# Altium PCB Edubot v1.2.PcbDoc
Units mm, origin at the board's own origin, x right, y up, seen from the top; angles counter-clockwise.
Board outline 65 x 56 mm, 4 copper layers (Top Signal Layer, Power Layer, Ground Layer, Bottom Signal Layer), stack 2.024 mm thick; 57 components, 41 nets, 232 pads, 151 vias.
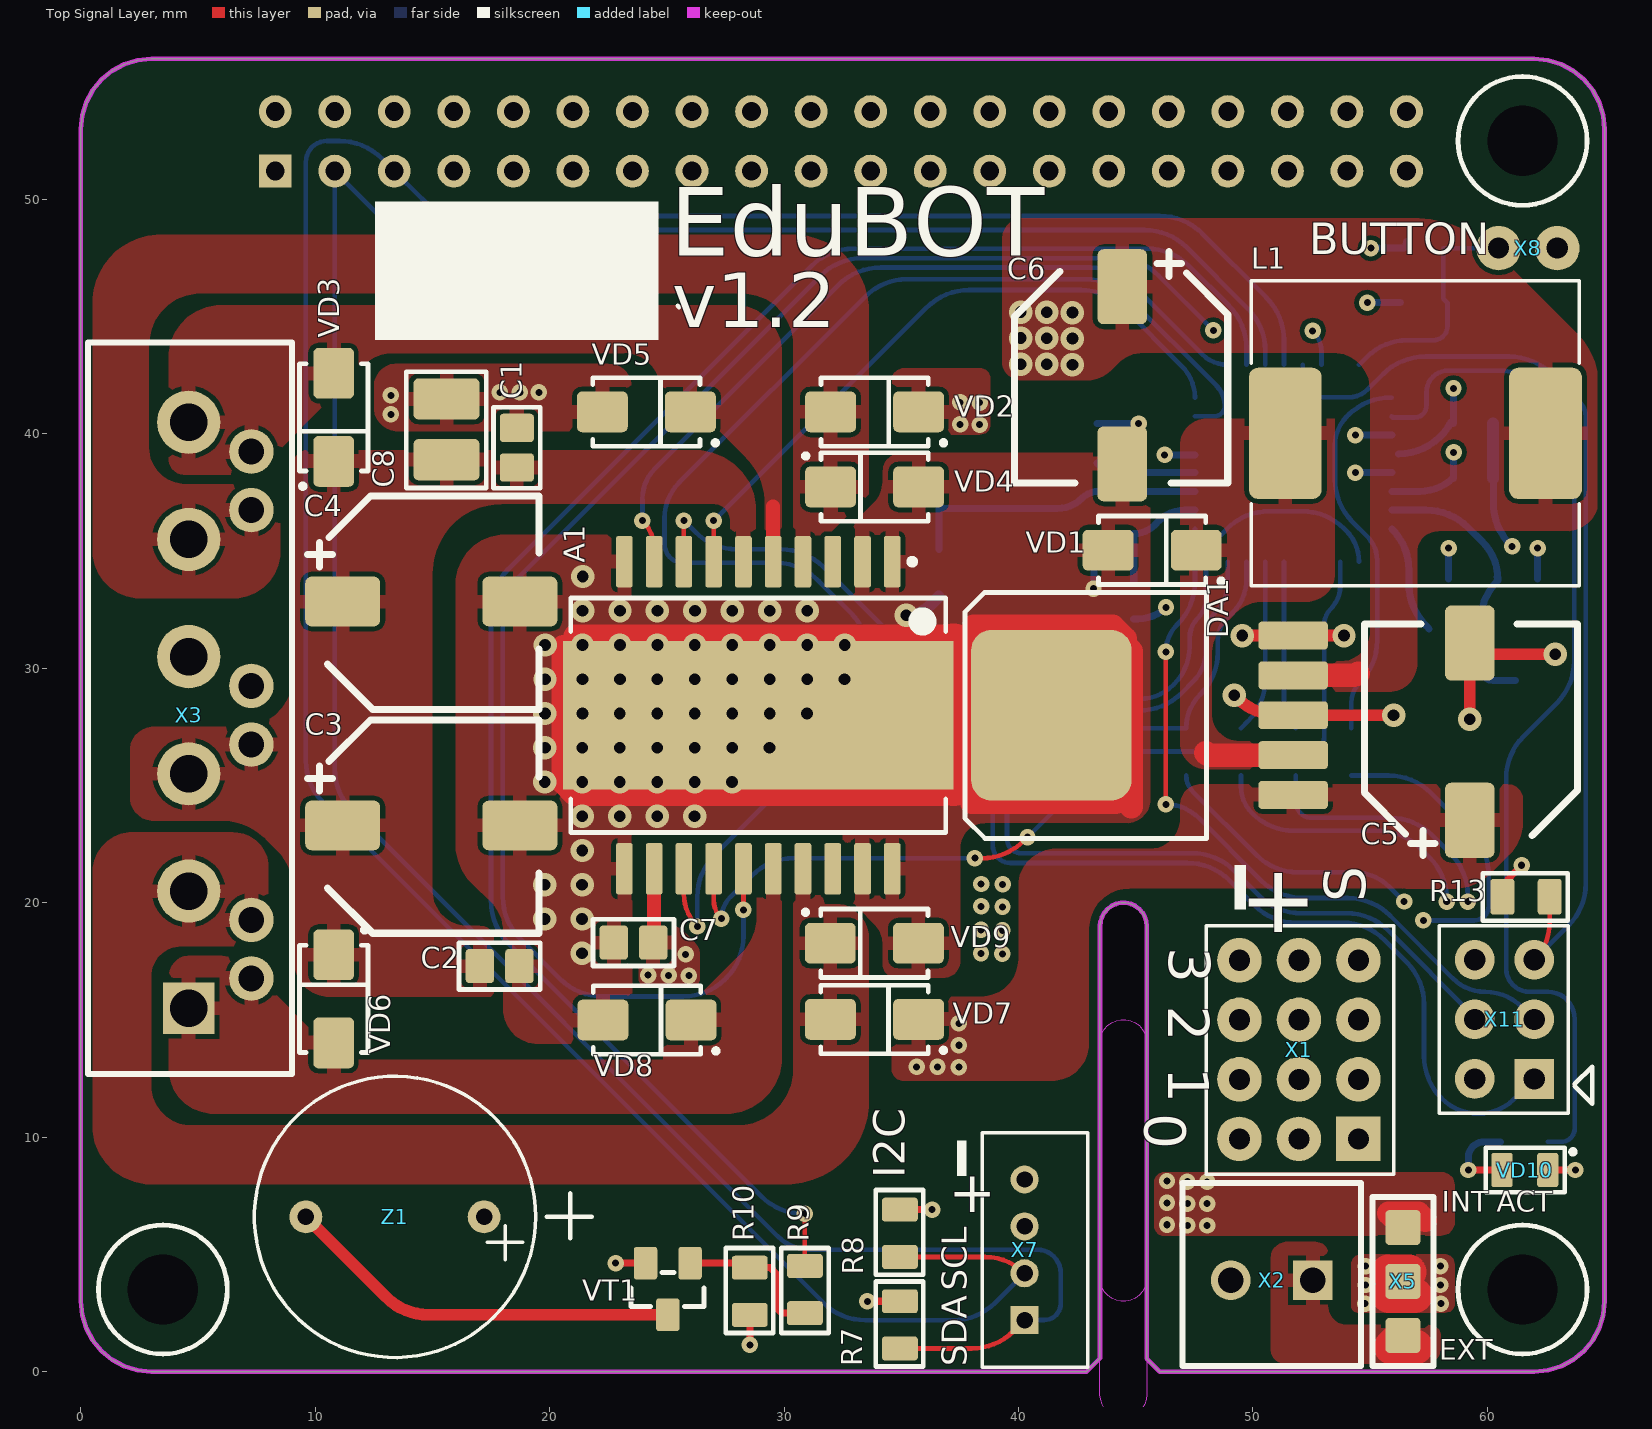
[diagram p0: Top Signal Layer view]
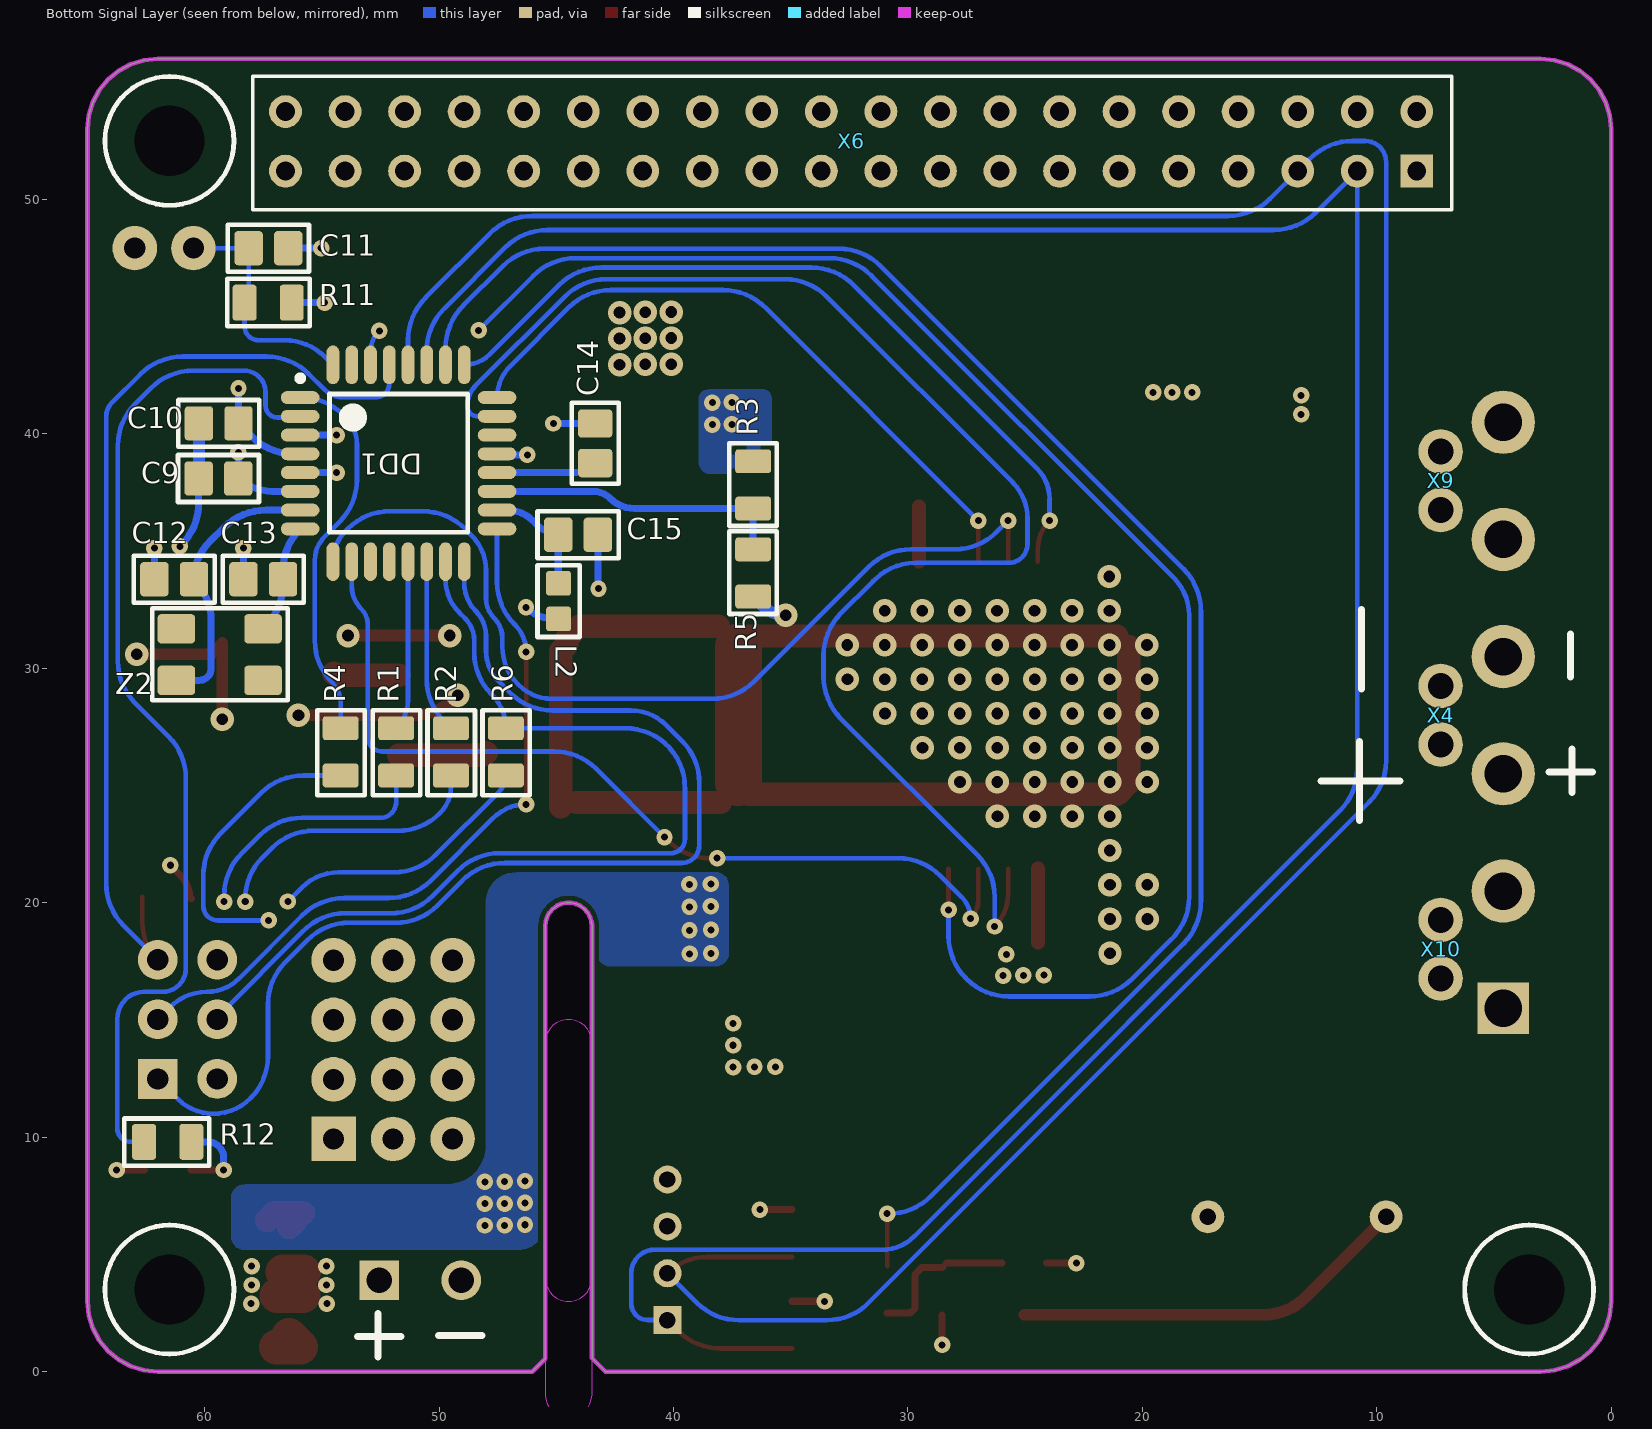
[diagram p1: Bottom Signal Layer view, seen from below]
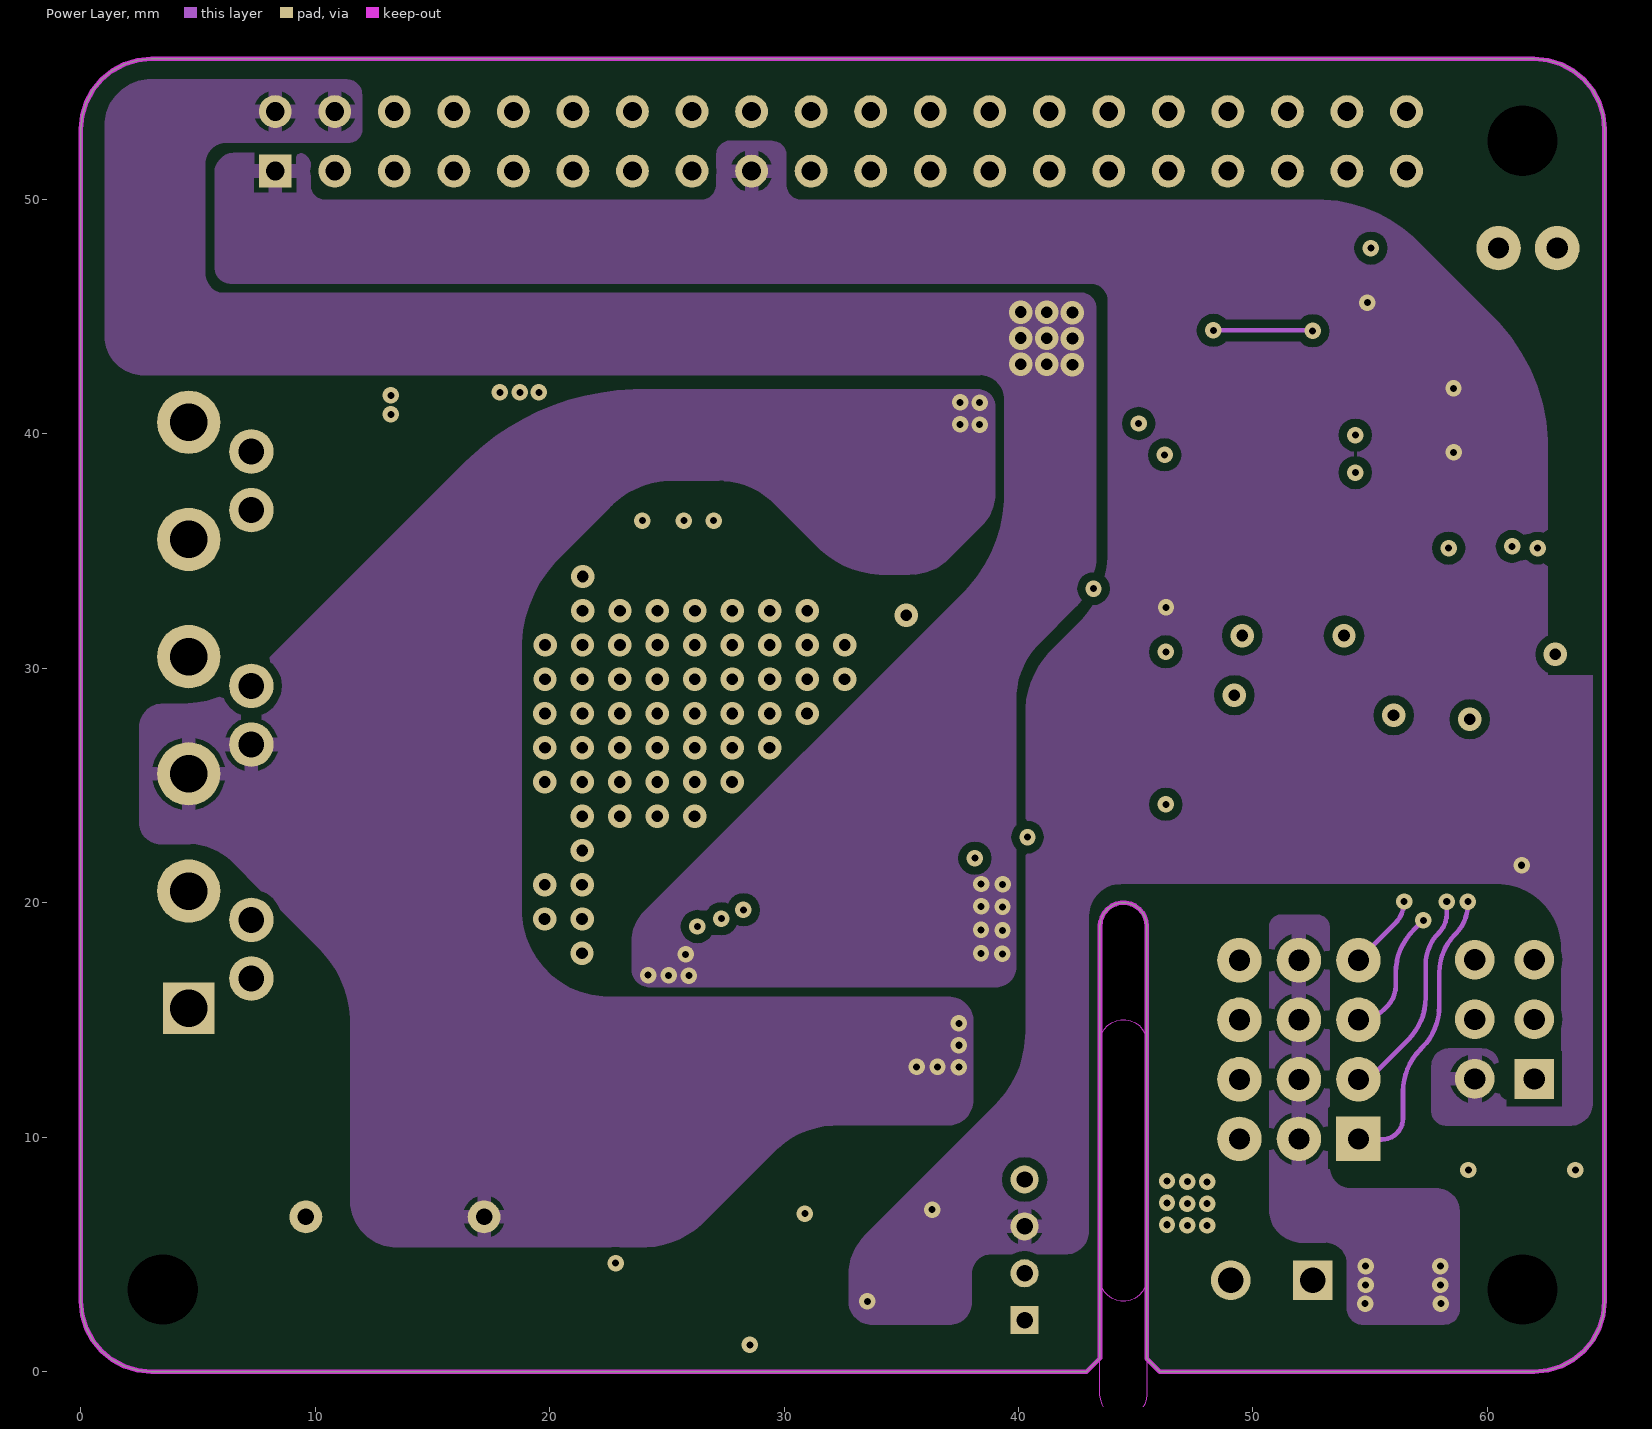
[diagram p2: Power Layer]
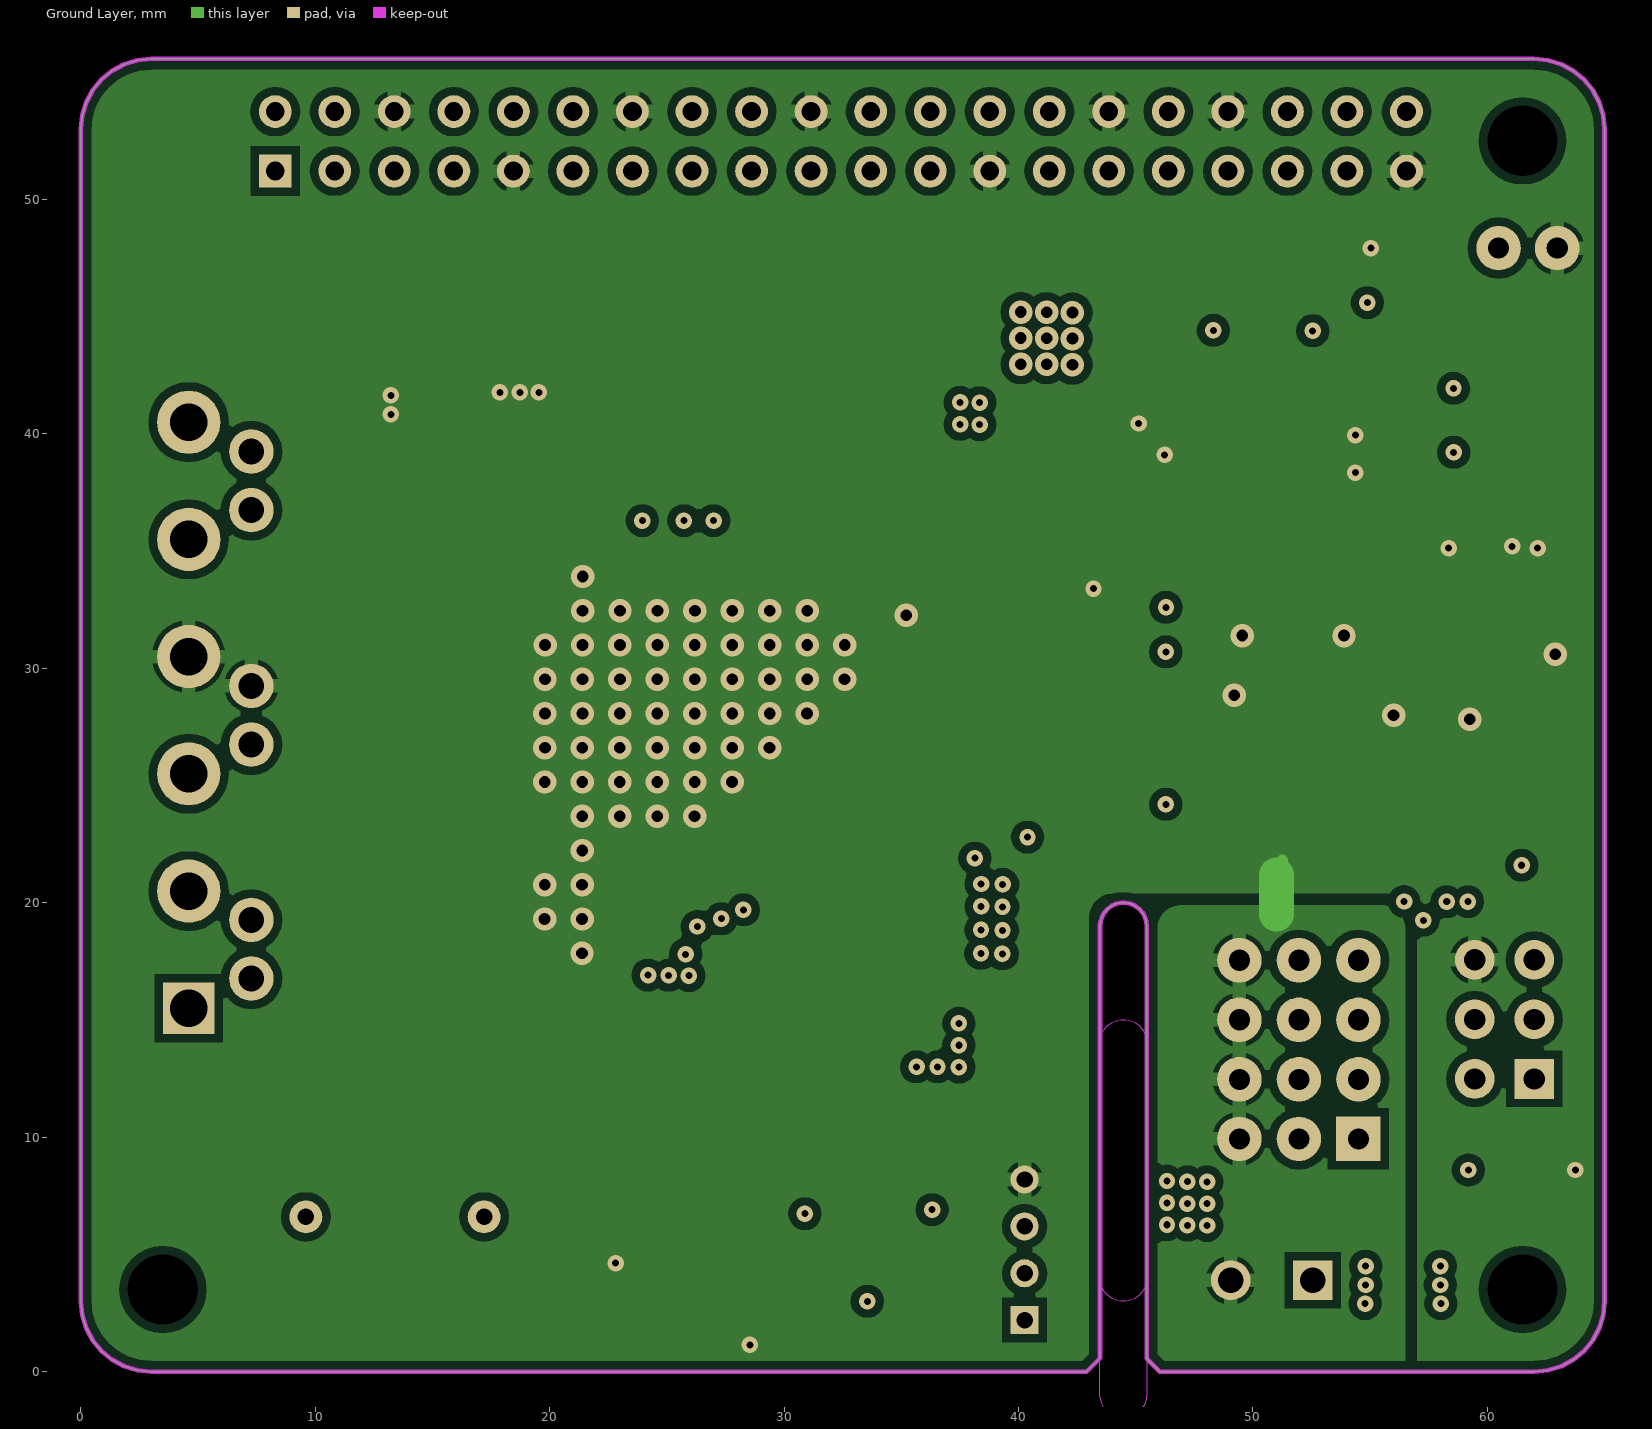
[diagram p3: Ground Layer]

## Layer stack, top to bottom
Top Solder: solder mask 0.0102, Solder Resist, Dk 3.5
Top Signal Layer: signal copper 0.0356
Dielectric 1: core 1.5, FR-4, Dk 4.2
Power Layer: signal copper 0.036
Dielectric 3: prepreg 0.127, Dk 4.2
Ground Layer: signal copper 0.036
Dielectric 2: core 0.254, Dk 4.2
Bottom Signal Layer: signal copper 0.0356
Bottom Solder: solder mask 0.0102, Solder Resist, Dk 3.5

## Board outline
0.879,0.879 0.506,1.333 0.228,1.852 0.058,2.415 0,3 0,53 0.058,53.585 0.228,54.148 0.506,54.667 0.879,55.121 1.333,55.494 1.852,55.772 2.415,55.942 3,56 62,56 62.585,55.942 63.148,55.772 63.667,55.494 64.121,55.121 64.494,54.667 64.772,54.148 64.942,53.585 65,53 65,3 64.942,2.415 64.772,1.852 64.494,1.333 64.121,0.879 63.667,0.506 63.148,0.228 62.585,0.058 62,0 46.025,0 45.475,0.55 45.475,19 45.453,19.208 45.389,19.407 45.284,19.588 45.144,19.743 44.975,19.866 44.784,19.951 44.58,19.995 44.37,19.995 44.166,19.951 43.975,19.866 43.806,19.743 43.666,19.588 43.561,19.407 43.497,19.208 43.475,19 43.475,0.575 42.9,0 3,0 2.415,0.058 1.852,0.228 1.333,0.506
cut-out: 45.475,4 45.453,3.792 45.389,3.593 45.284,3.412 45.144,3.257 44.975,3.134 44.784,3.049 44.58,3.006 44.37,3.006 44.166,3.049 43.975,3.134 43.806,3.257 43.666,3.412 43.561,3.593 43.497,3.792 43.475,4 43.475,19 43.497,19.208 43.561,19.407 43.666,19.588 43.806,19.743 43.975,19.866 44.166,19.951 44.37,19.995 44.58,19.995 44.784,19.951 44.975,19.866 45.144,19.743 45.284,19.588 45.389,19.407 45.453,19.208 45.475,19
cut-out: 45.475,-0.977 45.453,-1.185 45.389,-1.384 45.284,-1.565 45.144,-1.721 44.975,-1.843 44.784,-1.928 44.58,-1.972 44.37,-1.972 44.166,-1.928 43.975,-1.843 43.806,-1.721 43.666,-1.565 43.561,-1.384 43.497,-1.185 43.475,-0.977 43.475,14.023 43.497,14.231 43.561,14.429 43.666,14.61 43.806,14.766 43.975,14.889 44.166,14.974 44.37,15.017 44.58,15.017 44.784,14.974 44.975,14.889 45.144,14.766 45.284,14.61 45.389,14.429 45.453,14.231 45.475,14.023

## Design rules (kind name [scope] priority, off if disabled: settings)
Clearance Clearance_tracks_inner [OnLayer('Power Layer') OR OnLayer('Ground Layer')] p1: gap=0.35 // Зазоры между проводниками на внутренних слоях
Clearance Clearance_VccGND [InNet('12В') vs InNet('GND')] p2: gap=0.2 except(0.4: THPad-Poly)
Clearance Clearance_VccGND_5B [InNet('5В') vs InNet('GND')] p3: gap=0.2 except(0.4: THPad-Poly)
Clearance Clearance_VccGND_12B_1 [InNet('NetFU1_1') vs InNet('GND')] p4: gap=0.2 except(0.4: THPad-Poly)
Clearance [All] p5: gap=0.2
ComponentClearance [All] p1: gap=0.001 collisioncheckmode=3 verticalgap=0 showdistances=FALSE
Height [All] p1: minheight=0 maxheight=100 prefheight=12.7
HoleSize [All] p1: absolutevalues=TRUE maxlimit=10 minlimit=0.3 maxpercent=80.000 minpercent=20.000
MinimumSolderMaskSliver [All] p1: minsoldermaskwidth=0.1
PolygonConnect PolygonConnect_Via [IsVia] p1: connectstyle=Direct reliefconductorwidth=0.254 reliefentries=4 polygonreliefangle="90 Angle" airgapwidth=0.2
PolygonConnect [All] p2: connectstyle=Relief reliefconductorwidth=0.6 reliefentries=4 polygonreliefangle="90 Angle" airgapwidth=0.2
RoutingVias [All] p1: holewidth=0.711 width=1.27 viastyle="Through Hole" minholewidth=0.711 minwidth=1.27 maxholewidth=0.711 maxwidth=1.27
ShortCircuit ShortCircuitAGND [InNet('GND') vs InNet('AGND')] p1: allowed=TRUE
ShortCircuit ShortCircuitAnalog [InNet('12В') vs InNet('12ВA')] p2: allowed=TRUE
ShortCircuit ShortCircuitAll [All] p3: allowed=FALSE
SilkToSilkClearance [All] p1: silktosilkclearance=0
SilkToSolderMaskClearance [IsPad] p1: minsilkscreentomaskgap=0 clearancetoexposedcopper=TRUE
SolderMaskExpansion [All] p1: expansion=0.05
Width [All] p1: maxlimit=4 minlimit=0.2 preferedwidth=0.2
Width 3,3В [InNet('3,3В')] p2: maxlimit=2 minlimit=0.2 preferedwidth=1
Width 24В [InNet('24В')] p3: maxlimit=4 minlimit=0.2 preferedwidth=4
Width 5В [InNet('5В')] p4: maxlimit=3 minlimit=0.2 preferedwidth=3
23 further rules are at their usual default settings.

## Components (designator, comment, footprint, x,y, rotation, side; value= is the part's Value field where it differs from the comment)
A1 "L298P" POWERSO20 28.9,28 r270 top
C1 "2,2мк" C0805 18.6,39.411 r270 top
C2 "2,2мк" C0805 17.864,17.3 r180 top
C3 "Capacitor_pol" Cap_SMD_radial_polar(8x10.2) 14.95,23.3 r90 top
C4 "Capacitor_pol" Cap_SMD_radial_polar(8x10.2) 14.95,32.85 r90 top
C5 "Capacitor_pol" Cap_SMD_radial_polar(8x10.2) 59.25,27.3 r180 top
C6 "Capacitor_pol" Cap_SMD_radial_polar(8x10.2) 44.425,42.5 r0 top
C7 "0,1мк" C0805 23.575,18.3 r0 top
C8 "10мк" C1210 15.6,40.196 r270 top
C9 "0,1мк" C0805 59.41,38.1 r180 bottom
C10 "0,1мк" C0805 59.4,40.45 r180 bottom
C11 "0,1мк" C0805 57.278,47.925 r0 bottom
C12 "22" C0805 61.3,33.803 r180 bottom
C13 "22" C0805 57.5,33.803 r180 bottom
C14 "0,1мк" C0805 43.34,39.6 r270 bottom
C15 "0,1мк" C0805 44.07,35.7 r0 bottom
DA1 "LM2596S" TO-263-5 51.715,28 r90 top
DD1 "ATmega328P-AU" TQFP-32 51.725,38.75 r180 bottom
L1 "Inductor" IND_12.5x12.5 56.93,40.025 r0 top
L2 "Inductor" L0603 44.9,32.869 r270 bottom
R1 "Resistor_0,125Вт" R0805 51.83,26.437 r270 bottom
R2 "Resistor_0,125Вт" R0805 49.49,26.437 r270 bottom
R3 "Resistor_0,125Вт" R0805 36.6,37.826 r90 bottom
R4 "Resistor_0,125Вт" R0805 54.2,26.437 r270 bottom
R5 "Resistor_0,125Вт" R0805 36.6,34.07 r90 bottom
R6 "Resistor_0,125Вт" R0805 47.15,26.437 r270 bottom
R7 "Resistor_0,125Вт" R0805 34.939,1.994 r90 top
R8 "Resistor_0,125Вт" R0805 34.939,5.9 r90 top
R9 "Resistor_0,125Вт" R0805 30.884,3.5 r270 top
R10 "Resistor_0,125Вт" R0805 28.535,3.425 r90 top
R11 "Resistor_0,125Вт" R0805 57.291,45.6 r180 bottom
R12 "Resistor_0,125Вт" R0805 61.575,9.8 r0 bottom
R13 "Resistor_0,125Вт" R0805 61.65,20.257 r180 top
VD1 "DiodeSchottky" SMA 45.7,35.039 r180 top
VD2 "DiodeSchottky" SMA 33.86,40.94 r180 top
VD3 "DiodeSchottky" SMA 10.785,40.71 r90 top
VD4 "DiodeSchottky" SMA 33.86,37.74 r0 top
VD5 "DiodeSchottky" SMA 24.125,40.94 r180 top
VD6 "DiodeSchottky" SMA 10.785,15.9 r270 top
VD7 "DiodeSchottky" SMA 33.855,15.025 r180 top
VD8 "DiodeSchottky" SMA 24.15,15 r180 top
VD9 "DiodeSchottky" SMA 33.85,18.275 r0 top
VD10 "LED" L_0805 61.6,8.6 r180 top
VT1 "N-MOSFET" SOT23-3 25.04,3.425 r180 top
X1 "Servo" PLS-12 54.5,9.928 r180 top
X2 "Header_2_trm" TERMINAL-2WAY-3.5MM 50.8,3.896 r180 top
X3 "" TERMINAL-6WAY-5MM 4.6,28 r90 top locked
X4 "Header_2_sct" 2HOLE_2.5#1 7.822,28 r0 bottom
X5 "Header_3_sct" TAB_3PAD 56.4,3.846 r270 top
X6 "Подключение Raspberry" PBS-40 8.291,51.213 r270 bottom locked
X7 "Дисплей" MW-4M 40.257,5.194 r180 top
X8 "Header_2_sct" 2HOLE_2.5#2 61.73,48.475 r90 top
X9 "Header_2_sct" 2HOLE_2.5#1 7.822,38 r0 bottom
X10 "Header_2_sct" 2HOLE_2.5#1 7.822,18.02 r0 bottom
X11 "Программатор ISP mkII" PLS2-6 60.725,15.128 r180 top
Z1 "Name" Buzzer_gen_12mm 13.4,6.6 r180 top
Z2 "Crystal" QSMD5.0x3.2x1.0 59.359,30.588 r0 bottom

## Footprints (in the part's own frame and the unit in brackets; to place one, negate y for a bottom-side part, rotate by r counter-clockwise, add the part's x,y. Pads: shape width x height; smd on the part's side, far side on the other; paste and mask are expansions set on the pad)
2HOLE_2.5#1 [mm]
  round 1.9 hole 1.1: 1(-0.55,1.25) 2(-0.55,-1.25)
2HOLE_2.5#2 [mm]
  round 1.9 hole 0.9: 1(-0.55,1.25) 2(-0.55,-1.25)
Buzzer_gen_12mm [mm] "Излучатель звука"
  round 1.4 hole 0.7: 1(-3.8,0) 2(3.8,0)
  silkscreen extent -6,-6 6,6, body extent -9.5,-6.1 5.95,5.9, height 10.95
C0805 [mm]
  rrect25% 1.21x1.46 smd paste-5: 1(-0.845,0) 2(0.845,0)
  silkscreen extent -1.73,-1 1.73,1, body extent -1,-0.62 1,0.63, height 0.78
C1210 [mm]
  rrect25% 1.76x2.82 smd paste-5: 1(-1.295,0) 2(1.295,0)
  silkscreen extent -2.46,-1.72 2.51,1.7, body extent -1.62,-1.27 1.58,1.23, height 1.65
Cap_SMD_radial_polar(8x10.2) [mm]
  rrect25% 2.12x3.2 smd: 1(0,3.78) 2(0,-3.78)
  silkscreen extent -4.6,-4.6 4.5,5.27, body extent -4.17,-4.95 4.13,4.75, height 8.5
IND_12.5x12.5 [mm]
  rrect25% 3.1x5.6 smd: 1(-5.55,0) 2(5.55,0)
  silkscreen extent -7,-6.5 7,6.5, body extent -6.25,-6.25 6.25,6.25, height 8
L0603 [mm]
  rrect25% 1.05x1.07 smd paste-5: 1(-0.76,0) 2(0.76,0)
  silkscreen extent -1.53,-0.9 1.53,0.9, body extent -0.8,-0.4 0.8,0.4, height 0.8
L_0805 [mm] "SMD LED LAMP"
  rrect25% 0.91x1.46 smd: 1(-0.975,0) 2(0.975,0)
  silkscreen extent -2.15,-0.95 1.68,0.95, body extent -1.01,-0.62 1.01,0.63, height 1.1
MW-4M [mm]
  rect 1.2x1.2 hole 0.7: 1(0,3)
  round 1.2 hole 0.7: 2(0,1) 3(0,-1) 4(0,-3)
  silkscreen extent -2.7,-5 1.8,5, body extent -2.7,-4.95 1.8,4.95, height 6
PBS-40 [mm]
  rect 1.4x1.4 hole 0.8: 1(0,0)
  round 1.4 hole 0.8: 2(-2.54,0) 3(0,-2.54) 4(-2.54,-2.54) 5(0,-5.08) 6(-2.54,-5.08) 8(-2.54,-7.62) 9(0,-10.16) 10(-2.54,-10.16) 11(0,-12.7) 12(-2.54,-12.7) 13(0,-15.24) 14(-2.54,-15.24) 15(0,-17.78) 16(-2.54,-17.78) 19(0,-22.86) 20(-2.54,-22.86) 21(0,-25.4) 22(-2.54,-25.4) 23(0,-27.94) 24(-2.54,-27.94) 25(0,-30.48) 26(-2.54,-30.48) 27(0,-33.02) 28(-2.54,-33.02) 31(0,-38.1) 32(-2.54,-38.1) 33(0,-40.64) 34(-2.54,-40.64) 35(0,-43.18) 36(-2.54,-43.18) 39(0,-48.26) 40(-2.54,-48.26)
  round 1.4 hole 0.8 mask+0.102: 7(0,-7.62) 17(0,-20.32) 18(-2.54,-20.32) 29(0,-35.56) 30(-2.54,-35.56) 37(0,-45.72) 38(-2.54,-45.72)
  silkscreen extent -4.04,-49.66 1.66,1.5, body extent -3.81,-49.53 1.27,1.27, height 8.4
PLS2-6 [mm] "Разъем для программатора ISP"
  rect 1.7x1.7 hole 0.9: 1(-1.275,2.64)
  round 1.7 hole 0.9: 2(1.265,2.64) 3(-1.275,0.1) 4(1.265,0.1) 5(-1.275,-2.44) 6(1.265,-2.44)
  silkscreen extent -2.72,-3.9 2.77,4.1, body extent -2.52,-3.72 2.56,3.9, height 8.54
PLS-12 [mm]
  rect 1.9x1.9 hole 0.9: 1(0,0)
  round 1.9 hole 0.9: 2(2.54,0) 3(5.08,0) 4(0,-2.54) 5(2.54,-2.54) 6(5.08,-2.54) 7(0,-5.08) 8(2.54,-5.08) 9(5.08,-5.08) 11(2.54,-7.62) 12(5.08,-7.62)
  round 1.9 hole 0.9 mask+0.102: 10(0,-7.62)
  silkscreen extent -1.5,-9.1 6.5,1.5, body extent -1.31,-8.87 6.31,1.29, height 8.54
POWERSO20 [mm] "SOP, 20-Leads, Body 15.9x11mm, Pitch 1.27mm, IPC Medium Density"
  rrect25% 2.19x0.71 smd: 1(-6.55,5.715) 2(-6.55,4.445) 3(-6.55,3.175) 4(-6.55,1.905) 5(-6.55,0.635) 6(-6.55,-0.635) 7(-6.55,-1.905) 8(-6.55,-3.175) 9(-6.55,-4.445) 10(-6.55,-5.715) 11(6.55,-5.715) 12(6.55,-4.445) 13(6.55,-3.175) 14(6.55,-1.905) 15(6.55,-0.635) 16(6.55,0.635) 17(6.55,1.905) 18(6.55,3.175) 19(6.55,4.445) 20(6.55,5.715)
  rect 6.35x16.65 smd: 20(0,0)
  silkscreen extent -6.67,-8 5,8, body extent -7.15,-8 7.25,8, height 3.6
QSMD5.0x3.2x1.0 [mm] "Кварцевый резонатор KX-9A 8MHz"
  rrect25% 1.6x1.25 smd: 1(-1.85,-1.1) 2(1.85,1.1) ""(-1.85,1.1) ""(1.85,-1.1)
  silkscreen extent -2.9,-1.98 2.87,1.95, body extent -2.5,-1.6 2.5,1.6, height 1.01
R0805 [mm] "Chip Resistor, 2-Leads, Body 2,10x1,30mm, IPC Medium Density"
  rrect25% 1.02x1.53 smd paste-5: 1(-1.008,0) 2(1.007,0)
  silkscreen extent -1.78,-1 1.85,1.03, body extent -1.1,-0.7 1.1,0.7, height 0.55
SMA [mm]
  rrect25% 2.17x1.74 smd: 1(-1.88,0) 2(1.88,0)
  silkscreen extent -3.04,-1.46 2.29,1.46, body extent -2.5,-1.35 2.5,1.35, height 2.15
SOT23-3 [mm]
  rrect25% 1x1.4 smd: 1(-0.95,-1.2) 2(0.95,-1.2) 3(0,1)
  silkscreen extent -1.54,-0.8 1.57,0.65, body extent -1.5,-1.25 1.5,1.05, height 1.1
TAB_3PAD [mm]
  rrect25% 1.5x1.5 smd: 1(-2.3,0) 2(0,0) 3(2.3,0)
  silkscreen extent -3.6,-1.3 3.6,1.3
TERMINAL-2WAY-3.5MM [mm]
  rect 1.7x1.7 hole 1.1: 1(-1.75,0)
  round 1.7 hole 1.1: 2(1.75,0)
  silkscreen extent -3.8,-4.15 3.8,3.65, body extent -3.56,-3.89 3.56,3.4, height 8.51
TERMINAL-6WAY-5MM [mm]
  rect 2.2x2.2 hole 1.6: 1(-12.5,0)
  round 2.7 hole 1.6: 2(-7.5,0) 3(-2.5,0) 4(2.5,0) 5(7.5,0) 6(12.5,0)
  silkscreen extent -15.3,-4.4 15.9,4.3, body extent -14.98,-4.1 15.58,4.05, height 10
TO-263-5 [mm]
  rrect25% 1.19x2.96 smd: 1(-3.4,0) 2(-1.7,0) 3(0,0) 4(1.7,0) 5(3.4,0)
  rrect25% 7.28x6.84 smd: 6(0,10.315)
  silkscreen extent -5.26,3.7 5.23,14, body extent -5.08,-0.9 5.1,13.45, height 4.58
TQFP-32 [mm] "Thin QFP, 32-Leads, Body 7x7mm, Pitch 0.8mm, IPC Medium Density"
  oval 1.65x0.55 smd: 1(-4.2,2.8) 2(-4.2,2) 3(-4.2,1.2) 4(-4.2,0.4) 5(-4.2,-0.4) 6(-4.2,-1.2) 7(-4.2,-2) 8(-4.2,-2.8) 17(4.2,-2.8) 18(4.2,-2) 19(4.2,-1.2) 20(4.2,-0.4) 21(4.2,0.4) 22(4.2,1.2) 23(4.2,2) 24(4.2,2.8)
  oval 0.55x1.65 smd: 9(-2.8,-4.2) 10(-2,-4.2) 11(-1.2,-4.2) 12(-0.4,-4.2) 13(0.4,-4.2) 14(1.2,-4.2) 15(2,-4.2) 16(2.8,-4.2) 25(2.8,4.2) 26(2,4.2) 27(1.2,4.2) 28(0.4,4.2) 29(-0.4,4.2) 30(-1.2,4.2) 31(-2,4.2) 32(-2.8,4.2)
  silkscreen extent -4.32,-2.95 2.95,3.75, body extent -4.6,-4.6 4.6,4.6, height 1.2

## Part data
A1: library part driver1, "FULL BRIDGE DC MOTOR DRIVER"
C1 C2: library part cap152, "Конденсатор"
C3 C4 C5 C6: library part cap320, "Конденсатор полярный"
C7 C9 C10 C11 C14 C15: library part cap160, "Конденсатор"
C8: library part cap193, "Конденсатор"
C12 C13: library part cap321, "Конденсатор"
DA1: library part pwr3, "3-A Step-Down Voltage Regulator"
DD1: library part microcont1, "Микроконтроллер 8-Бит, picoPower, AVR, 20МГц, 32КБ Flash"
L1: library part ind80, "EMI Suppression Filter"
L2: library part ind0, "EMI Suppression Filter"
R1 R2 R4 R6 R9 R12: library part res41, "Резистор"
R3: library part res84, "Резистор"
R5: library part res57, "Резистор"
R7 R8 R10 R11 R13: library part res101, "Резистор"
VD1 VD2 VD3 VD4 VD5 VD6 VD7 VD8 VD9: library part diode1, "Диод Шоттки"
VD10: library part diode5, "Светодиод"
VT1: library part mosfert2
X1: library part connect135, "Разъем - 12 конт. розетка"
X2: library part connect34, "Разъем - 2 конт. клеммник"
X3: library part connect11, "POWER"
X4 X8 X9 X10: library part connect9, "Разъем - 2 конт. розетка"
X5: library part connect138, "Разъем - 3 конт. розетка"
X6: library part connect29, "Разъем - 5 конт. розетка"
X7: library part connect80, "Разъем - 4 конт. розетка"
X11: library part connect41, "Разъем - 6 конт. вилка"
Z1: library part buzzer1, "Пьезоизлучатель звуковой без генератора"
Z2: library part crystal0, "Кварцевый резонатор"

## Free pads (board coordinates)
  round 0 hole 3 unplated: ""(3.5,3.5) ""(61.5,3.5) ""(61.5,52.5)

## Via types
v1: diameter 0.7, hole 0.3, Top Signal Layer to Bottom Signal Layer, tented both sides, 78 vias
v2: diameter 1, hole 0.5, Top Signal Layer to Bottom Signal Layer, 57 vias
v3: diameter 1, hole 0.5, Top Signal Layer to Bottom Signal Layer, tented both sides, 16 vias

## Nets (pads, with @x,y where several pads share a name; then routed paths per layer and width w, separated by ;. In a path a pad name is that pad's centre, name@x,y a point inside that pad or via, vN(x,y) a via of type N, cw(c..) or ccw(c..) an arc to the next point about the centre after c; other vN are vias at no path point)
3,3B: C9.2 C10.2 DD1.4 DD1.6 L2.2 R7.2 R8.2 R11.2 R13.2 X6.1 X6.17 X7.3 X11.2 | length 15.6
  Top Signal Layer w0.3: v1@33.552,3.002 R7.2 ; R8.2 v1(36.315,6.908) ; R13.2@60.571,20.186 R13.2 cw(c61.899,20.257) 61.01,21.145 v1(61.465,21.6)
  Bottom Signal Layer w0.3: L2.2 45.105,32.109 ccw(c45.105,33.786) v1(46.291,32.6) ; v1(54.883,45.6) R11.2 ; DD1.6 57.116,37.55 ccw(c57.116,39.599) C9.2@58.565,38.15 ; DD1.4@56.203,39.15 ccw(c56.203,41.69) C10.2@58.45,40.505 ; C10.2 v1(58.555,41.944) ; C9.2 C9.2@58.565,38.15 ; v1(58.565,39.216) C9.2@58.565,38.15
  other v1: 33.55,3
5В: A1.12 C6.1 C7.2 DA1.4 L1.2 X5.1 X6.2 X6.4 | length 8.5
  Top Signal Layer w0.6: C7.2@24.445,18.3 24.455,18.31 A1.12
  Top Signal Layer w1: DA1.4 54.259,29.7 ccw(c54.259,30.041) 54.5,29.8 ; X5.1 55.796,6.75 57.054,6.75 57.358,6.446
  other v1: 47.2,6.236 48.045,6.231 46.332,6.265 47.2,7.168 48.045,7.164 46.332,7.197 47.2,8.1 48.045,8.096 46.332,8.129 25.07,16.904 25.94,16.894 24.2,16.914 25.8,17.8 39.312,17.821 38.397,17.838 39.315,18.825 38.4,18.842 39.318,19.829 38.403,19.846 39.322,20.783 38.407,20.8
  other v3: 41.2,42.967 42.3,42.956 40.1,42.978 41.2,44.078 42.3,44.067 40.1,44.089 42.3,45.178 40.1,45.2 41.2,45.189
8,4В: A1.6 C1.2 C2.2 C3.1 C4.1 C5.1 C8.2 DA1.1 R3.2 VD2.1 VD3.1 VD6.1 VD7.1 X3.3 X4.1 Z1.1
  other v1: 37.457,12.99 35.65,13 36.545,13 37.457,13.922 37.457,14.854 38.344,40.4 37.512,40.411 37.512,41.343 38.344,41.332
BUTTON: C11.2 DD1.32 R11.1 X8.1 | length 10.2
  Bottom Signal Layer w0.2: DD1.32 54.85,43.275 cw(c56.6,41.526) 56.6,44 57.7,44 ccw(c57.7,44.6) 58.3,44.6 R11.1 R11.1 58.123,45.775 C11.2 X8.1
BUZZER: DD1.26 R9.1 | length 75.8
  Top Signal Layer w0.2: R9.1 v1(30.884,6.735)
  Bottom Signal Layer w0.2: v1(30.884,6.735) 30.814,6.735 cw(c30.814,9.275) 29.018,7.479 18.244,18.254 cw(c20.04,20.05) 17.5,20.05 17.5,32.448 cw(c20.04,32.448) 18.244,34.244 31.156,47.156 cw(c32.952,45.36) 32.952,47.9 45.487,47.9 cw(c45.487,45.36) 47.283,47.156 48.981,45.458 cw(c47.185,43.662) 49.725,43.662 DD1.26
GND: A1.1 A1.2 A1.10 A1.11 A1.19 A1.20 C1.1 C2.1 C3.2 C4.2 C5.2 C6.2 C7.1 C8.1 C9.1 C10.1 C11.1 C12.1 C13.1 C14.1 C15.1 DA1.3 DA1.5 DA1.6 DD1.3 DD1.5 DD1.21 R5.1 R10.1 VD1.2 VD4.2 VD5.2 VD8.2 VD9.2 VD10.1 VT1.2 X1.3 X1.6 X1.9 X1.12 X2.2 X3.4 X4.2 X6.6 X6.9 X6.14 X6.20 X6.25 X6.30 X6.34 X6.39 X7.4 X8.2 X11.6 | length 108.4
  Top Signal Layer w0.3: v1(22.815,4.625) VT1.2 ; v1(28.535,1.143) R10.1 ; VD10.1 v1(63.75,8.6)
  Top Signal Layer w0.5: v3(49.205,28.857) 49.318,28.744 ccw(c51.115,30.54) 51.115,28 DA1.3 v3(56,28) ; v3(49.545,31.4) DA1.5 v3(53.885,31.4) ; v3(59.25,27.83) C5.2 ccw(c59.334,31.08) 59.334,30.996 59.63,30.7 59.73,30.6 v3(62.9,30.6)
  Top Signal Layer w1: A1.20@20.575,30.922 20.575,25.125 21.079,24.621 36.795,24.621 ; 21.079,31.379 36.795,31.379 ; 38,24.276 44.151,24.276 ; 38.09,31.8 44.014,31.8 44.548,31.266 44.548,31 44.81,30.738 44.81,24.095
  Top Signal Layer w2: A1.20@37.225,25.125 A1.20@37.225,30.922
  Ground Layer w0.5: 51,21.186 cw(c51.868,21.186) 51.254,21.8
  Ground Layer w1.5: 51,19.528 51,21.186
  Bottom Signal Layer w0.3: v1(43.2,33.4) ccw(c43.14,33.46) 43.225,33.46 C15.1 ; C14.1 v1(45.124,40.445) ; v1(46.23,39.106) DD1.21@47.525,39.106 ; v1(54.365,38.35) DD1.5 ; v1(54.365,39.95) DD1.3 ; v1(55.033,47.925) C11.1 ccw(c56.15,48.209) C11.1@56.551,48.209 ; C13.1 v1(58.345,35.132) ; C9.1 60.255,37.05 ccw(c62.795,37.05) 60.999,35.254 v1(61.053,35.2) ; C12.1 v1(62.145,35.132)
  Bottom Signal Layer w0.5: v3(35.214,32.263) ccw(c35.214,33.676) 36.214,32.677 R5.1 ; C10.1 60.245,38.124 ccw(c60.279,38.124) C9.1
  other v1: 13.222,40.838 13.222,41.646 17.876,41.775 18.73,41.775 19.538,41.775
  other v2: 21.377,17.847 19.782,19.308 21.38,19.308 19.785,20.769 21.382,20.769 21.385,22.23 21.387,23.691 22.985,23.691 24.582,23.691 26.18,23.691 19.792,25.152 21.39,25.152 22.987,25.152 24.585,25.152 26.182,25.152 27.78,25.152 19.795,26.613 21.392,26.613 22.99,26.613 24.587,26.613 26.185,26.613 27.782,26.613 29.38,26.613 19.797,28.074 21.395,28.074 22.992,28.074 24.59,28.074 26.187,28.074 27.785,28.074 29.382,28.074 30.98,28.074 19.8,29.535 21.397,29.535 22.995,29.535 24.592,29.535 26.19,29.535 27.787,29.535 29.385,29.535 30.982,29.535 32.58,29.535 19.803,30.996 21.4,30.996 22.997,30.996 24.595,30.996 26.192,30.996 27.79,30.996 29.387,30.996 30.985,30.996 32.582,30.996 21.403,32.457 23,32.457 24.597,32.457 26.195,32.457 27.792,32.457 29.39,32.457 30.987,32.457 21.405,33.918
IN1A: A1.7 DD1.24 | length 28.4
  Top Signal Layer w0.2: A1.7 v1(26.995,36.3)
  Bottom Signal Layer w0.2: v1(26.995,36.3) 36.093,45.398 cw(c37.889,43.602) 37.889,46.142 42.666,46.142 cw(c42.666,43.602) 44.462,45.398 46.97,42.89 cw(c45.63,41.55) DD1.24
IN1B: A1.9 DD1.25 | length 33.7
  Top Signal Layer w0.2: v1(23.955,36.3) cw(c22.748,35.093) 24.455,35.093 A1.9
  Bottom Signal Layer w0.2: v1(23.955,36.3) 23.955,37.218 cw(c25.816,37.218) 24.5,38.534 32.322,46.356 cw(c34.119,44.56) 34.119,47.1 43.082,47.1 cw(c43.082,44.56) 44.878,46.356 47.83,43.403 ccw(c48.925,44.498) DD1.25
IN2A: A1.13 DD1.23 | length 61.6
  Top Signal Layer w0.2: A1.13 25.725,20.374 ccw(c27.688,20.374) v1(26.3,18.986)
  Bottom Signal Layer w0.2: v1(26.3,18.986) 26.3,20.248 cw(c28.84,20.248) 27.044,22.044 32.856,27.856 ccw(c31.06,29.652) 33.6,29.652 33.6,30.548 ccw(c31.06,30.548) 32.856,32.344 31.544,33.656 ccw(c29.748,31.86) 31.395,33.794 ccw(c29.69,32.089) 29.69,34.5 25.7,34.5 cw(c25.7,35.3) 24.9,35.3 24.9,36.4 cw(c27.073,36.4) 25.536,37.936 33.456,45.856 cw(c35.252,44.06) 35.252,46.6 42.848,46.6 cw(c42.848,44.06) 44.644,45.856 48.446,42.054 cw(c47.593,41.2) 48.8,41.2 cw(c48.35,41.2) 48.35,40.75 DD1.23
IN2B: A1.15 DD1.30 | length 72.7
  Top Signal Layer w0.2: v1(28.265,19.7) A1.15
  Power Layer w0.2: v1(48.31,44.418) 52.507,44.418 cw(c52.507,44.357) v1(52.55,44.4)
  Bottom Signal Layer w0.2: v1(28.265,19.7) 28.265,18.573 cw(c25.725,18.573) 27.521,16.777 27.488,16.744 cw(c25.692,18.54) 25.692,16 22.252,16 cw(c22.252,18.54) 20.456,16.744 18.744,18.456 cw(c20.54,20.252) 18,20.252 18,32.263 cw(c20.263,32.263) 18.663,33.863 31.556,46.756 cw(c33.352,44.96) 33.352,47.5 44.176,47.5 cw(c44.176,44.96) 45.972,46.756 v1(48.31,44.418) ; v1(52.55,44.4) cw(c51.645,43.495) 52.925,43.495 DD1.30
LED: DD1.2 R12.2 | length 44.5
  Bottom Signal Layer w0.2: DD1.2 ccw(c55.975,40.75) 55.975,40.7 56.9,40.7 ccw(c56.9,41.2) 57.4,41.2 57.4,41.775 cw(c58.325,41.775) 58.325,42.7 60.493,42.7 cw(c60.493,40.16) 62.289,41.956 62.956,41.289 cw(c61.16,39.493) 63.7,39.493 63.7,30.309 cw(c61.16,30.309) 62.956,28.513 61.544,27.101 ccw(c63.34,25.305) 60.8,25.305 60.8,17.2 ccw(c61.8,17.2) 61.8,16.2 62.6,16.2 cw(c62.6,15.1) 63.378,15.878 cw(c62.54,15.04) 63.725,15.04 63.725,10.375 cw(c63.15,10.375) 63.15,9.8 R12.2
MISO: DD1.16 X11.1 | length 49.2
  Bottom Signal Layer w0.2: DD1.16 48.925,33.613 cw(c47.291,33.613) 48.446,32.457 ccw(c49.524,31.38) 48,31.38 48,30.765 cw(c46.132,30.765) 47.453,29.444 46.953,28.944 cw(c45.157,30.74) 45.157,28.2 41.818,28.2 ccw(c41.818,26.054) 40.301,27.572 ccw(c41.818,26.054) 40.3,27.571 39.644,26.915 ccw(c41.44,25.119) 38.9,25.119 38.9,22.442 ccw(c39.642,22.442) 39.642,21.7 47.201,21.7 cw(c47.201,19.16) 48.997,20.956 50.061,19.892 ccw(c51.857,21.688) 51.857,19.148 53.825,19.148 cw(c53.825,16.608) 55.621,18.404 56.556,17.469 cw(c54.76,15.673) 57.3,15.673 57.3,13.452 ccw(c59.84,13.452) 58.044,11.656 ccw(c59.628,13.24) 59.628,11 ccw(c59.628,13.134) 61.137,11.625 X11.1
MOSI/PWM_S3: DD1.15 R6.1 X11.4 | length 42.1
  Bottom Signal Layer w0.2: DD1.15 49.725,33.782 cw(c47.771,33.782) 49.153,32.4 48.893,32.141 ccw(c49.843,31.191) 48.5,31.191 48.5,30.677 cw(c45.987,30.677) 47.764,28.9 47.745,28.88 ccw(c49.18,27.445) R6.1 42.052,27.445 ccw(c42.052,24.905) 39.512,24.905 39.512,22.712 ccw(c40.106,22.712) 40.106,22.118 47.399,22.118 cw(c47.399,19.578) 49.195,21.374 50.272,20.297 ccw(c52.069,22.093) 52.069,19.553 53.989,19.553 cw(c53.989,17.013) 55.785,18.809 59.385,15.208 cw(c59.205,15.028) X11.4
MOTOR1: A1.8 DD1.9 | length 39.9
  Top Signal Layer w0.2: A1.8 v1(25.725,36.3)
  Bottom Signal Layer w0.2: v1(25.725,36.3) 26.204,35.821 ccw(c28,37.618) 28,35.078 29.87,35.078 cw(c29.87,32.538) 31.666,34.334 36.556,29.444 ccw(c38.352,31.24) 38.352,28.7 45.165,28.7 ccw(c45.165,30.749) 46.614,29.3 46.626,29.312 ccw(c44.998,30.94) 47.3,30.94 47.3,31.297 cw(c48.493,31.297) 47.65,32.141 ccw(c46.803,32.987) 48,32.987 48,34.186 cw(c50.114,34.186) 48.619,35.681 48.894,35.956 cw(c50.69,34.16) 50.69,36.7 52.098,36.7 cw(c52.098,34.16) 53.894,35.956 53.977,35.873 cw(c52.654,34.55) DD1.9
MOTOR2: A1.14 DD1.10 | length 38.8
  Top Signal Layer w0.2: A1.14 26.995,20.12 ccw(c28.125,20.12) v1(27.326,19.321) ; v1(38.139,21.9) 38.43,21.9 ccw(c38.43,24.44) 40.227,22.644 v1(40.383,22.8)
  Bottom Signal Layer w0.2: v1(27.326,19.321) cw(c28.63,19.321) 27.708,20.243 28.621,21.156 cw(c30.417,19.36) 30.417,21.9 v1(38.139,21.9) ; v1(40.383,22.8) 43.295,25.712 cw(c45.091,23.916) 45.091,26.456 52.431,26.456 ccw(c52.431,27.065) 53.041,27.065 53.041,31.881 cw(c53.926,31.881) 53.3,32.507 ccw(c52.274,33.534) 53.725,33.534 DD1.10
NetA1_4: A1.4 VD2.2 VD4.1 X3.5 X9.1
NetA1_5: A1.5 VD3.2 VD5.1 X3.6 X9.2 | length 2.4
  Top Signal Layer w0.6: A1.5 29.535,36.91
NetA1_16: A1.16 VD6.2 VD8.1 X3.1 X10.1
NetA1_17: A1.17 VD7.2 VD9.1 X3.2 X10.2
NetC12_2: C12.2 DD1.7 Z2.2 | length 12
  Bottom Signal Layer w0.3: DD1.7 57.381,36.75 cw(c57.381,34.21) 59.177,36.006 59.801,35.382 cw(c58.221,33.803) C12.2 ; C12.2@60.413,33.904 cw(c60.311,33.803) C12.2 ; Z2.2 60.233,29.488 cw(c60.233,30) 59.721,30 59.721,32.03 cw(c62.113,32.03) 60.421,33.721 ccw(c60.34,33.803) C12.2
NetC13_2: C13.2 DD1.8 Z2.1 | length 4.7
  Bottom Signal Layer w0.3: DD1.8 cw(c54.163,34.188) 56.655,34.188 C13.2 56.655,33.595 ccw(c59.195,33.595) 57.399,31.798 Z2.1
NetC14_2: C14.2 DD1.20 | length 4.3
  Bottom Signal Layer w0.3: C14.2 ccw(c44.318,39.733) 44.318,38.35 DD1.20
NetC15_2: C15.2 DD1.18 L2.1 | length 5
  Bottom Signal Layer w0.3: L2.1@44.915,33.629 C15.2 44.915,35.75 ccw(c44.915,37.042) 45.828,36.128 46,36.3 cw(c47.086,35.214) 47.086,36.75 DD1.18
NetDA1_2: DA1.2 L1.1 VD1.1 | length 3.8
  Top Signal Layer w1: 47.992,26.4 ccw(c48.233,26.641) 48.233,26.3 DA1.2
NetR1_2: R1.2 X1.1 | length 23.3
  Power Layer w0.2: X1.1 ccw(c54.528,9.928) 54.528,9.9 55.5,9.9 ccw(c55.5,10.8) 56.4,10.8 56.4,11.948 cw(c58.94,11.948) 57.144,13.744 57.208,13.808 ccw(c55.412,15.605) 57.952,15.605 57.952,17.013 cw(c60.293,17.013) 58.638,18.669 ccw(c57.357,19.949) 59.168,19.949 v1(59.168,20.046)
  Bottom Signal Layer w0.2: R1.2 51.83,24.3 ccw(c52.509,24.3) 52.509,23.621 55.854,23.621 cw(c55.854,21.081) 57.65,22.877 58.425,22.103 cw(c56.628,20.307) 59.168,20.307 v1(59.168,20.046)
NetR2_2: R2.2 X1.4 | length 21.1
  Power Layer w0.2: X1.4 ccw(c54.5,13.511) 55.237,12.774 56.622,14.158 ccw(c54.826,15.954) 57.366,15.954 57.366,17.346 cw(c59.315,17.346) 57.937,18.724 ccw(c57.139,19.522) 58.267,19.522 v1(58.267,20.046)
  Bottom Signal Layer w0.2: R2.2 49.49,24.966 ccw(c51.119,24.966) 49.967,23.814 ccw(c51.763,25.61) 51.763,23.07 55.346,23.07 cw(c55.346,20.53) 57.142,22.326 57.523,21.945 cw(c55.727,20.149) 58.267,20.149 v1(58.267,20.046)
NetR4_2: R4.2 X1.7 | length 18
  Power Layer w0.2: X1.7 ccw(c54.5,16.583) 55.613,15.469 55.732,15.588 ccw(c54.859,16.461) 56.094,16.461 56.094,17.023 cw(c58.634,17.023) 56.838,18.819 v1(57.266,19.247)
  Bottom Signal Layer w0.2: R4.2 55.793,25.43 cw(c55.793,22.89) 57.589,24.686 59.313,22.962 cw(c57.517,21.166) 60.057,21.166 60.057,19.866 cw(c59.438,19.866) 59.438,19.247 v1(57.266,19.247)
NetR6_2: R6.2 X1.10 | length 14.8
  Power Layer w0.2: X1.10 56.052,19.101 ccw(c55.1,20.053) v1(56.447,20.053)
  Bottom Signal Layer w0.2: R6.2 ccw(c48.118,25.43) 47.434,24.745 50.135,22.044 ccw(c51.931,23.84) 51.931,21.3 54.297,21.3 cw(c54.297,19.119) 55.839,20.661 v1(56.447,20.053)
NetR9_2: R9.2 R10.2 VT1.1 | length 6.4
  Top Signal Layer w0.3: VT1.1 R10.2@28.342,4.625 ; R10.2@28.513,4.455 R10.2 29.417,4.433 29.7,4.15 29.7,2.693 29.9,2.492 R9.2
NetR12_1: R12.1 VD10.2 | length 3.7
  Top Signal Layer w0.3: v1(59.19,8.6) VD10.2@60.59,8.6
  Bottom Signal Layer w0.3: v1(59.19,8.6) 59.19,9.129 cw(c59.861,9.129) 59.861,9.8 R12.1
NetVT1_3: VT1.3 Z1.2 | length 17.1
  Top Signal Layer w0.5: Z1.2 13.031,3.169 ccw(c14.827,4.965) 14.827,2.425 VT1.3
PWM_S0: DD1.13 R1.1 | length 7.2
  Bottom Signal Layer w0.2: DD1.13 51.325,28.664 ccw(c53.049,28.664) R1.1
PWM_S1: DD1.14 R2.1 | length 7.4
  Bottom Signal Layer w0.2: R2.1 49.781,27.736 ccw(c47.985,29.532) 50.525,29.532 DD1.14
PWM_S2: DD1.1 R4.1 | length 16.4
  Bottom Signal Layer w0.2: R4.1 54.2,28.535 cw(c55.416,28.535) 54.556,29.395 ccw(c52.76,31.191) 55.3,31.191 55.3,34.6 ccw(c53.851,34.6) 54.876,35.624 54.244,36.256 cw(c56.04,38.052) 53.5,38.052 53.5,39.516 cw(c55.244,39.516) 54.011,40.75 54.067,40.806 cw(c55.863,39.01) 54.934,41.374 cw(c55.863,39.01) 55.863,41.55 DD1.1
PWR_OUT: X2.1 X5.3 | length 1.7
  Top Signal Layer w1.5: X5.3 55.904,1.05 X5.3@56.931,1.05
RESET: DD1.29 R13.1 X11.5 | length 41.7
  Top Signal Layer w0.2: X11.5 ccw(c60.413,19.155) 62.657,19.155 R13.1
  Bottom Signal Layer w0.2: DD1.29 52.125,42.136 ccw(c52.7,42.136) 52.7,41.561 54.083,41.561 ccw(c54.083,42.717) 54.9,41.9 55.556,42.556 cw(c57.352,40.76) 57.352,43.3 60.937,43.3 cw(c60.937,40.76) 62.733,42.556 63.959,41.33 cw(c63.377,40.748) 64.2,40.748 64.2,20.82 cw(c61.66,20.82) 63.456,19.024 X11.5
SCK: DD1.17 X11.3 | length 31.1
  Top Signal Layer w0.2: v1(46.281,24.2) v1(46.281,30.7)
  Bottom Signal Layer w0.2: v1(46.281,24.2) cw(c46.281,22.224) 47.679,23.621 50.356,20.944 ccw(c52.152,22.74) 52.152,20.2 54.05,20.2 cw(c54.05,17.66) 55.846,19.456 58.533,16.769 ccw(c59.907,18.144) 59.907,16.2 cw(c59.907,13.977) 61.479,15.549 X11.3 ; v1(46.281,30.7) cw(c47.927,30.7) 46.763,31.863 46.781,31.881 ccw(c44.985,33.677) 47.525,33.677 DD1.17
SCL: DD1.28 R8.1 X6.5 X7.2 | length 119.7
  Top Signal Layer w0.2: R8.1 38.571,4.893 cw(c38.571,2.508) X7.2
  Bottom Signal Layer w0.2: X7.2 39.001,2.938 cw(c37.205,4.734) 37.205,2.194 33.458,2.194 cw(c33.458,4.734) 31.865,2.756 10.329,24.291 cw(c12.09,26.052) 9.6,26.052 9.6,51.6 cw(c10.5,51.6) 10.5,52.5 11.032,52.5 cw(c11.032,49.96) 12.828,51.756 X6.5 14.54,50.044 ccw(c16.336,51.84) 16.336,49.3 46.029,49.3 cw(c46.029,46.76) 47.825,48.556 50.581,45.8 cw(c48.785,44.004) 51.325,44.004 DD1.28
SDA: DD1.27 R7.1 X6.3 X7.1 | length 118.7
  Top Signal Layer w0.2: R7.1 37.998,0.987 ccw(c37.998,3.527) 39.794,1.731 X7.1
  Bottom Signal Layer w0.2: X7.1 40.257,2.2 41.1,2.2 ccw(c41.1,2.9) 41.8,2.9 41.8,4.2 ccw(c40.8,4.2) 40.8,5.2 31.096,5.2 cw(c31.096,7.122) 29.737,5.763 11.575,23.925 cw(c13.371,25.721) 10.831,25.721 X6.3 12.6,49.444 ccw(c14.396,51.24) 14.396,48.7 45.376,48.7 cw(c45.376,46.16) 47.172,47.956 49.781,45.347 cw(c47.985,43.551) 50.525,43.551 DD1.27
SERVO_PWR: X1.2 X1.5 X1.8 X1.11 X5.2 | length 2.7
  Top Signal Layer w1.5: X5.2@55.789,4.25 56.658,4.25 56.254,3.846 X5.2 ; X5.2@55.8,3.246 X5.2@56.9,3.246
  other v1: 54.783,2.9 58.017,2.9 54.806,3.693 57.994,3.693 54.806,4.5 57.994,4.5
VOLTAGE: DD1.19 R3.1 R5.2 | length 12.9
  Bottom Signal Layer w0.3: R5.2 R3.1 41.655,36.819 ccw(c41.655,38.296) 42.7,37.251 cw(c43.421,36.531) 43.421,37.55 DD1.19
pads on no net: A1.3 A1.18 DD1.11 DD1.12 DD1.22 DD1.31 X6.7 X6.8 X6.10 X6.11 X6.12 X6.13 X6.15 X6.16 X6.18 X6.19 X6.21 X6.22 X6.23 X6.24 X6.26 X6.27 X6.28 X6.29 X6.31 X6.32 X6.33 X6.35 X6.36 X6.37 X6.38 X6.40 Z2.

## Polygon pours and split planes (outlines as drawn)
8,4В on Top Signal Layer "Top Signal Layer-No Net" (solid, remove dead copper, pour order 116): 34.6,16 34.6,12.915 ccw(c35.115,12.915) 35.115,12.4 41.4,12.4 ccw(c41.4,14) 43,14 43,16 43,18.884 cw(c44.716,18.884) 44.716,20.6 58.526,20.6 ccw(c58.526,22.905) 60.155,21.275 60.913,22.033 ccw(c59.497,23.449) 61.5,23.449 61.5,24.425 ccw(c60.875,24.425) 60.875,25.05 47.765,25.05 ccw(c47.765,24.185) 46.9,24.185 46.9,23.6 cw(c45.6,23.6) 45.6,22.3 43,22.3 41.6,22.3 ccw(c41.6,20.7) 40,20.7 40,17.6 cw(c38.4,17.6) 38.4,16
GND on Top Signal Layer "Top Signal Layer-No Net" (solid, remove dead copper, pour order 98): 16,32.5 16,27 16,22.463 ccw(c18.299,22.463) 16.673,20.837 17.54,19.97 cw(c16.385,18.814) 18.02,18.812 18.02,15.473 ccw(c19.513,15.473) 19.514,13.979 23.531,13.979 23.531,20.3 23.531,22.9 32.5,22.9 32.5,20.428 33.886,19.042 cw(c33.129,18.285) 34.2,18.285 34.2,17.415 ccw(c34.815,17.415) 34.815,16.8 36.796,16.8 ccw(c36.796,17.516) 37.512,17.516 37.512,22.351 cw(c38.561,22.351) 38.561,23.4 44.609,23.4 ccw(c44.609,24.409) 45.618,24.409 45.618,39.201 35.038,39.201 ccw(c35.037,38.364) 34.2,38.364 34.2,37.941 cw(c32.994,37.94) 33.846,37.087 33.268,36.509 ccw(c34.154,35.621) 32.9,35.621 32.9,33 23.531,33 23.531,35.7 18.1,35.7 ccw(c18.099,33.601) 16,33.6
NetA1_4 on Top Signal Layer "Top Signal Layer-No Net" (solid, remove dead copper, pour order 88): 2.9,43.778 2.9,39.423 ccw(c4.46,39.423) 4.46,37.862 8.5,37.862 8.5,34.967 cw(c6.533,34.967) 6.533,33 2.516,33 cw(c2.516,35.011) 0.506,35.011 0.506,45.592 cw(c3.414,45.592) 3.414,48.5 30.345,48.5 cw(c30.345,45.245) 33.6,45.245 33.6,37.428 31.472,35.3 31.214,34.55 31.084,34.55 30.722,34.55 30.4,34.55 30.4,36 30.4,43.8 ccw(c28.2,43.8) 28.2,46 5.122,46 ccw(c5.121,43.779)
NetA1_5 on Top Signal Layer "Top Signal Layer-No Net" (solid, remove dead copper, pour order 86): 6,45.5 27.849,45.5 cw(c27.849,43.444) 29.905,43.444 29.905,35.923 29.905,35.82 29.18,35.82 29.18,37.052 ccw(c26.462,37.052) 28.383,38.974 27.1,40.257 24.725,40.257 24.725,41.899 ccw(c23.18,41.899) 23.18,43.444 13.299,43.444 ccw(c13.299,41.738) 12.093,42.944 7.399,38.25 4.435,38.25 cw(c4.435,38.935) 3.75,38.935 3.75,43.25 cw(c6,43.25)
8,4В on Top Signal Layer "Top Signal Layer-No Net" (solid, remove dead copper, pour order 118): 34.605,39.965 34.605,42.289 cw(c35.116,42.289) 35.116,42.8 38.347,42.8 cw(c38.347,42.347) 38.8,42.347 38.8,40.424 cw(c38.341,40.424) 38.341,39.965
NetA1_17 on Top Signal Layer "Top Signal Layer-No Net" (solid, remove dead copper, pour order 92): 27.996,10.5 4.7,10.5 cw(c4.7,12.2) 3,12.2 3,16.861 cw(c4.276,16.861) 4.276,18.137 8,18.138 8,21.508 ccw(c6.508,21.508) 6.508,23 2.2,23 ccw(c2.2,21.306) 0.506,21.306 0.506,10.494 ccw(c3,10.494) 3,8 30.1,8 ccw(c30.1,11.5) 33.6,11.5 33.6,18.554 ccw(c32.369,18.554) 33.239,19.425 32.972,19.692 ccw(c32.385,19.105) 32.385,19.935 31.734,19.935 31.214,21.45 31.084,21.45 30.722,21.45 30.4,21.45 30.4,20 30.4,12.904 cw(c27.996,12.904)
NetA1_16 on Top Signal Layer "Top Signal Layer-No Net" (solid, remove dead copper, pour order 94): 5.696,11 27.5,11 ccw(c27.5,13.405) 29.905,13.405 29.905,15.75 29.905,20.75 29.386,20.75 28.835,20.199 28.835,19.42 cw(c26.628,19.42) 28.188,17.859 26.292,15.963 24.84,15.96 24.84,13.3 11.1,13.3 7.232,17.168 ccw(c5.827,15.762) 5.827,17.75 4.66,17.75 ccw(c4.66,16.84) 3.75,16.84 3.75,12.946 ccw(c5.696,12.946)
GND on Top Signal Layer "Top Signal Layer-No Net" (solid, remove dead copper, pour order 106): 12.505,42.026 12.505,41.138 ccw(c13.518,41.138) 13.518,40.125 23.485,40.125 23.485,42.015 ccw(c22.5,42.015) 22.5,43 13.479,43 ccw(c13.479,42.026)
8,4В on Top Signal Layer "Top Signal Layer-No Net" (solid, remove dead copper, pour order 96): 3.1,23.5 5.99,23.5 cw(c5.99,20.822) 7.885,22.715 8.382,22.218 cw(c6.649,20.485) 9.1,20.484 9.1,17.5 ccw(c10.6,17.5) 10.6,16 14.6,16 17.624,16 17.624,18.411 ccw(c17.018,18.411) 17.018,19.018 16.482,19.018 cw(c16.482,20.502) 14.998,20.502 14.998,34.066 cw(c17.931,34.066) 17.931,37 26.998,37 cw(c26.998,36.298) 27.7,36.298 27.7,33.43 28.8,33.432 28.8,36.7 ccw(c26.2,36.7) 26.2,39.3 9.625,39.3 ccw(c9.625,38.775) 9.1,38.775 9.1,29.735 cw(c6.866,29.734) 6.865,27.5 3.1,27.5 ccw(c3.1,26.5) 2.1,26.5 2.1,24.5 ccw(c3.1,24.5)
5В on Top Signal Layer "Top Signal Layer-No Net" (solid, remove dead copper, pour order 126): 23.8,18.986 23.8,16.744 ccw(c24.144,16.744) 24.144,16.4 26.056,16.4 ccw(c26.056,16.744) 26.4,16.744 26.4,17.774 ccw(c25.614,17.774) 26.17,18.33 25.741,18.759 ccw(c25.089,18.106) 25.089,19.029 23.8,19.029
NetDA1_2 on Top Signal Layer "Top Signal Layer-No Net" (solid, remove dead copper, pour order 108): 48.017,40.64 53.5,40.64 53.5,34.036 cw(c52.315,34.035) 52.314,32.85 50.431,32.85 ccw(c50.431,31.204) 49.267,32.368 48.801,31.902 ccw(c50.172,30.531) 48.233,30.531 48.233,28.067 ccw(c49.4,28.067) 49.4,26.9 53.44,26.9 53.44,25.7 48,25.7 cw(c48,26.8) 46.9,26.8 46.9,39.524 cw(c48.017,39.524)
5В on Top Signal Layer "Top Signal Layer-No Net" (solid, remove dead copper, pour order 110): 53.731,30.3 50,30.3 50,29 55.8,29 ccw(c55.8,30.2) 57,30.2 57,34.939 cw(c57.915,34.939) 57.915,35.854 63.354,35.854 ccw(c63.354,37.272) 64.772,37.272 64.772,41.961 ccw(c61.473,41.962) 63.805,44.295 60.349,47.751 ccw(c56.852,44.255) 56.851,49.2 40.2,49.2 ccw(c40.2,48.3) 39.3,48.3 39.3,43.3 39.3,43.075 ccw(c40.075,43.075) 40.075,42.3 42.969,42.3 ccw(c42.969,43.653) 43.926,42.696 44.246,43.017 cw(c45.309,41.955) 45.309,43.457 53.443,43.457 cw(c53.443,41.9) 55,41.9 55,31.569 cw(c53.731,31.569)
PWR_OUT on Top Signal Layer "Top Signal Layer-No Net" (solid, remove dead copper, pour order 132): 50.75,4.825 50.75,0.975 ccw(c51.4,0.975) 51.4,0.325 57.324,0.325 ccw(c57.324,1.019) 58.018,1.017 58.019,1.48 ccw(c57.5,1.482) 57.5,2 54.001,2 cw(c54.001,2.801) 53.2,2.801 53.2,5 ccw(c52.67,5) 52.67,5.53 51.455,5.53 ccw(c51.455,4.825)
SERVO_PWR on Top Signal Layer "Top Signal Layer-No Net" (solid, remove dead copper, pour order 136): 54.2,2.8 54.2,4.56 cw(c54.64,4.56) 54.64,5 58.17,5 cw(c58.17,4.57) 58.6,4.57 58.6,2.9 cw(c58.2,2.9) 58.2,2.5 54.5,2.5 cw(c54.5,2.8)
5В on Top Signal Layer "Top Signal Layer-No Net" (solid, remove dead copper, pour order 138): 45.784,6.216 45.784,8.068 cw(c46.216,8.068) 46.216,8.5 58.05,8.5 cw(c58.05,7.95) 58.6,7.95 58.6,6.375 cw(c58.025,6.375) 58.025,5.8 46.2,5.8 cw(c46.2,6.216)
3,3B on Power Layer "Top Signal Layer-No Net" (solid, remove dead copper, pour order 120): 9.27,51.999 6.587,52 ccw(c6.586,51.116) 5.701,51.115 5.701,47.126 ccw(c6.428,47.126) 6.428,46.4 36.7,46.4 43.1,46.4 cw(c43.1,45.695) 43.806,45.694 43.806,34.927 cw(c39.597,34.926) 42.572,31.949 41.42,30.796 ccw(c44.122,28.093) 40.3,28.093 40.3,14.49 cw(c35.919,14.49) 39.017,11.392 33.474,5.849 ccw(c35.223,4.101) 32.75,4.101 32.75,3 ccw(c33.75,3) 33.75,2 37.056,2 ccw(c37.056,2.952) 38.008,2.952 38.008,4.208 cw(c38.796,4.208) 38.796,4.996 41.996,4.996 ccw(c41.996,6) 43,6 43,19.439 cw(c44.361,19.439) 44.361,20.8 60.432,20.8 cw(c60.432,18.084) 63.148,18.084 63.148,11.558 60.943,11.558 cw(c60.943,12.001) 60.5,12.002 60.5,13.058 ccw(c59.758,13.058) 59.758,13.8 58.411,13.8 ccw(c58.411,12.989) 57.6,12.989 57.6,11.8 57.6,11.148 ccw(c58.269,11.148) 58.27,10.479 63.501,10.479 ccw(c63.501,11.473) 64.494,11.473 64.494,29.7 62.586,29.7 62.586,39.335 ccw(c54.55,39.335) 60.231,45.019 57.043,48.207 ccw(c52.716,43.881) 52.714,50 30.7,50 cw(c30.699,50.599) 30.1,50.6 30.1,51.899 ccw(c29.5,51.9) 29.499,52.5 27.701,52.5 ccw(c27.7,51.9) 27.1,51.899 27.1,50.6 cw(c26.502,50.598) 26.5,50 26.071,50 10.389,50 cw(c10.389,50.589) 9.8,50.589 9.8,51.471 ccw(c9.272,51.471)
5В on Power Layer "Top Signal Layer-No Net" (solid, remove dead copper, pour order 112): 3.033,55.14 6.813,55.141 11.291,55.141 cw(c11.291,54.42) 12.013,54.419 12.013,53.019 cw(c11.413,53.019) 11.413,52.419 6.199,52.419 ccw(c6.199,51.533) 5.313,51.533 5.312,46.821 ccw(c6.115,46.821) 6.115,46.019 42.681,46.019 cw(c42.681,45.39) 43.311,45.389 43.309,42.276 43.305,34.658 cw(c40.454,34.659) 42.47,32.642 40.863,31.035 ccw(c43.185,28.711) 39.9,28.711 39.9,17.254 cw(c39.045,17.254) 39.045,16.4 38.371,16.4 24.26,16.4 cw(c24.259,17.159) 23.5,17.16 23.5,18.317 cw(c25.39,18.317) 24.054,19.654 37.678,33.278 ccw(c33.521,37.435) 39.4,37.435 39.4,41.471 ccw(c38.371,41.471) 38.371,42.5 2.7,42.5 cw(c2.7,44.187) 1.013,44.187 1.013,53.119 cw(c3.033,53.119)
8,4В on Power Layer "Top Signal Layer-No Net" (solid, remove dead copper, pour order 114): 3.5,28.5 4.381,28.5 ccw(c4.381,32.649) 7.315,29.715 16.386,38.786 cw(c23.903,31.269) 23.905,41.9 38.3,41.9 cw(c38.3,41.2) 39,41.2 39,38 39,37.497 cw(c36.937,37.497) 38.396,36.038 37.066,34.709 cw(c35.355,36.421) 35.354,34 34.251,34 cw(c34.251,37.986) 31.433,35.167 29.566,37.034 ccw(c27.235,34.705) 27.234,38 25.207,38 ccw(c25.206,34.364) 22.634,36.934 20.419,34.719 ccw(c24.326,30.811) 18.8,30.811 18.8,19.7 ccw(c22.5,19.7) 22.5,16 37,16 cw(c37,14.925) 38.075,14.925 38.075,11.6 cw(c36.975,11.6) 36.975,10.5 32.249,10.5 ccw(c32.249,6.762) 29.605,9.405 26.595,6.395 cw(c23.951,9.039) 23.951,5.3 13.5,5.3 cw(c13.5,7.3) 11.5,7.3 11.5,14.851 ccw(c7.04,14.853) 10.193,18.007 6.426,21.774 ccw(c4.674,20.024) 4.673,22.5 3.4,22.5 cw(c3.4,23.4) 2.5,23.4 2.5,27.5 cw(c3.5,27.5)
SERVO_PWR on Power Layer "Top Signal Layer-No Net" (solid, remove dead copper, pour order 134): 51.17,19.483 52.745,19.483 cw(c52.745,18.95) 53.278,18.95 53.282,8.715 ccw(c54.179,8.715) 54.179,7.819 57.826,7.819 cw(c57.827,6.824) 58.821,6.824 58.821,2.67 cw(c58.151,2.67) 58.151,2 54.694,2 cw(c54.694,2.683) 54.011,2.683 54.011,4.589 ccw(c53.1,4.589) 53.1,5.5 52.098,5.5 cw(c52.098,6.903) 50.695,6.903 50.701,19.014 cw(c51.17,19.014)
GND on Ground Layer "Top Signal Layer-No Net" (solid, remove dead copper, pour order 122): 0,56 65,56 65,21 65,0.058 57,0.058 57,19.461 ccw(c56.061,19.461) 56.061,20.4 44.057,20.4 ccw(c44.057,19.343) 43,19.343 43,0.058 0,0.058 0,21
GND on Ground Layer "Top Signal Layer-No Net" (solid, remove dead copper, pour order 124): 45.922,0 56.5,0 56.5,18.847 ccw(c55.447,18.847) 55.447,19.9 46.949,19.9 ccw(c46.949,18.873) 45.922,18.873
5В on Bottom Signal Layer "Top Signal Layer-No Net" (solid, remove dead copper, pour order 128): 45.475,19.588 45.475,6.339 ccw(c46.613,6.339) 46.614,5.2 58.307,5.2 ccw(c58.307,5.763) 58.87,5.763 58.87,7.395 ccw(c58.265,7.395) 58.265,8 49.624,8 cw(c49.624,9.624) 48,9.624 48,20 ccw(c46.7,20) 46.7,21.3 38.203,21.3 ccw(c38.203,20.747) 37.65,20.747 37.65,20.353 37.65,17.857 ccw(c38.207,17.857) 38.207,17.3 42.7,17.3 ccw(c42.7,17.9) 43.3,17.9 43.3,19.588
8,4В on Bottom Signal Layer "Top Signal Layer-No Net" (solid, remove dead copper, pour order 130): 35.8,38.3 38.446,38.3 ccw(c38.446,38.772) 38.918,38.772 38.918,41.482 ccw(c38.5,41.482) 38.5,41.9 36.2,41.9 ccw(c36.2,41.5) 35.8,41.5

## Keep-outs
Keep-Out Layer:
  lines w0.2: 0,3 0,53 0.058,53.585 0.228,54.148 0.506,54.667 0.879,55.121 1.333,55.494 1.852,55.772 2.415,55.942 3,56 62,56 62.585,55.942 63.148,55.772 63.667,55.494 64.121,55.121 64.494,54.667 64.772,54.148 64.942,53.585 65,53 65,16.829 65,3 64.942,2.415 64.772,1.852 64.494,1.333 64.121,0.879 63.667,0.506 63.148,0.228 62.585,0.058 62,0 46.025,0 45.475,0.55 45.475,19 45.453,19.208 45.389,19.407 45.284,19.588 45.144,19.743 44.975,19.866 44.784,19.951 44.58,19.995 44.37,19.995 44.166,19.951 43.975,19.866 43.806,19.743 43.666,19.588 43.561,19.407 43.497,19.208 43.475,19 43.475,0.575 42.9,0 3,0 2.415,0.058 1.852,0.228 1.333,0.506 0.879,0.879 0.506,1.333 0.228,1.852 0.058,2.415 0,3

## Other copper
Bottom Signal Layer:
  pour cut-out: 58.636,49.664 65,49.664 65,56 58.636,56
  pour cut-out: 6.336,6.364 6.336,0 0,0 0,6.364
  pour cut-out: 58.664,3.664 ccw(c62.329,3.664) 62.329,0 ccw(c62.329,2.671) 65,2.671 65,3 ccw(c61.636,3) 61.636,6.364 61.364,6.364 ccw(c61.364,3.664)

## Silkscreen, mask and mechanical layers (free items; w line width, h text height)
Top Overlay:
  circle w0.2: c3.5,3.5 r2.75
  circle w0.2: c61.5,52.5 r2.75
  circle w0.2: c61.5,3.5 r2.75
  region: 37.371,9.854 37.371,8.354 37.771,8.354 37.771,9.854
  region: 49.711,19.72 49.711,21.62 49.211,21.62 49.211,19.72
  region: 24.642,44 24.642,49.914 12.542,49.914 12.542,44
  lines w0.2: 19.875,6.6 21.788,6.6 ; 20.875,5.687 20.875,7.6 ; 25.467,45.464 25.517,45.414 ; 63.73,12.17 64.47,11.43 64.47,13.01 63.73,12.27
  text "BUTTON" at 52.4,47.211 h2.3
  text "EduBOT" at 25.137,46.65 h5
  text "v1.2" at 25.225,43.778 h4
  text "+" at 52.761,22.22 h5 r180
  text "S" at 55.361,20.02 h3 r90
  text "3" at 45.848,18.1 h3 r270
  text "2" at 45.818,15.6 h3 r270
  text "1" at 45.818,12.98 h3 r270
  text "0" at 47.7,9.48 h3 r90
  text "I2C" at 35.591,8.25 h2.3 r90
  text "INT" at 58.044,6.523 h1.5
  text "ACT" at 60.393,6.523 h1.5
  text "+" at 37.023,6.219 h3
  text "SCL" at 38.15,3.457 h1.8 r90
  text "SDA" at 38.15,0.228 h1.8 r90
  text "EXT" at 57.943,0.203 h1.5
Bottom Overlay:
  circle w0.2: c61.5,52.5 r2.75
  circle w0.2: c61.5,3.5 r2.75
  circle w0.2: c3.5,3.5 r2.75
  lines w0.3: 0.8,25.575 2.65,25.575 ; 1.675,24.7 1.675,26.55 ; 1.725,29.625 1.725,31.475 ; 9,25.2 12.375,25.2 ; 10.65,29.125 10.65,32.5 ; 10.725,23.5 10.725,26.875 ; 48.175,1.546 50.025,1.546 ; 51.625,1.5 53.475,1.5 ; 52.6,0.625 52.6,2.475